# Altium PCB lab2_Kondrashova_buck_boost.PcbDoc
Units mm, origin at the board's own origin, x right, y up, seen from the top; angles counter-clockwise.
Board outline 37.1 x 18.6 mm, 4 copper layers (Top Layer, Signal Layer 1, Signal Layer 2, Bottom Layer), stack 1.522 mm thick; 17 components, 10 nets, 51 pads, 132 vias.
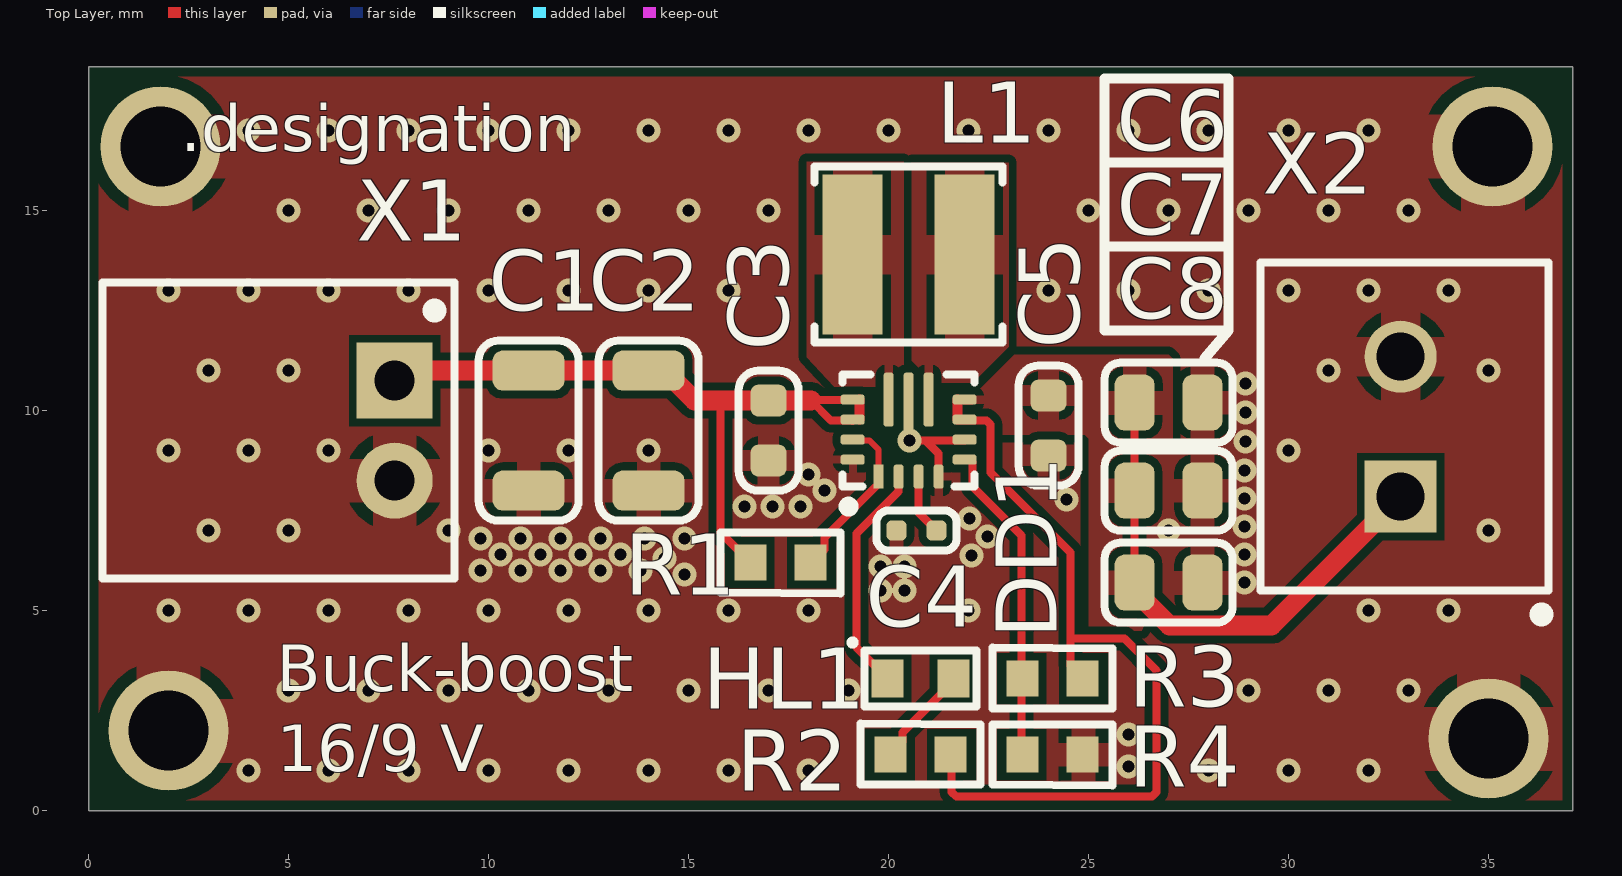
[diagram p0: Top Layer view]
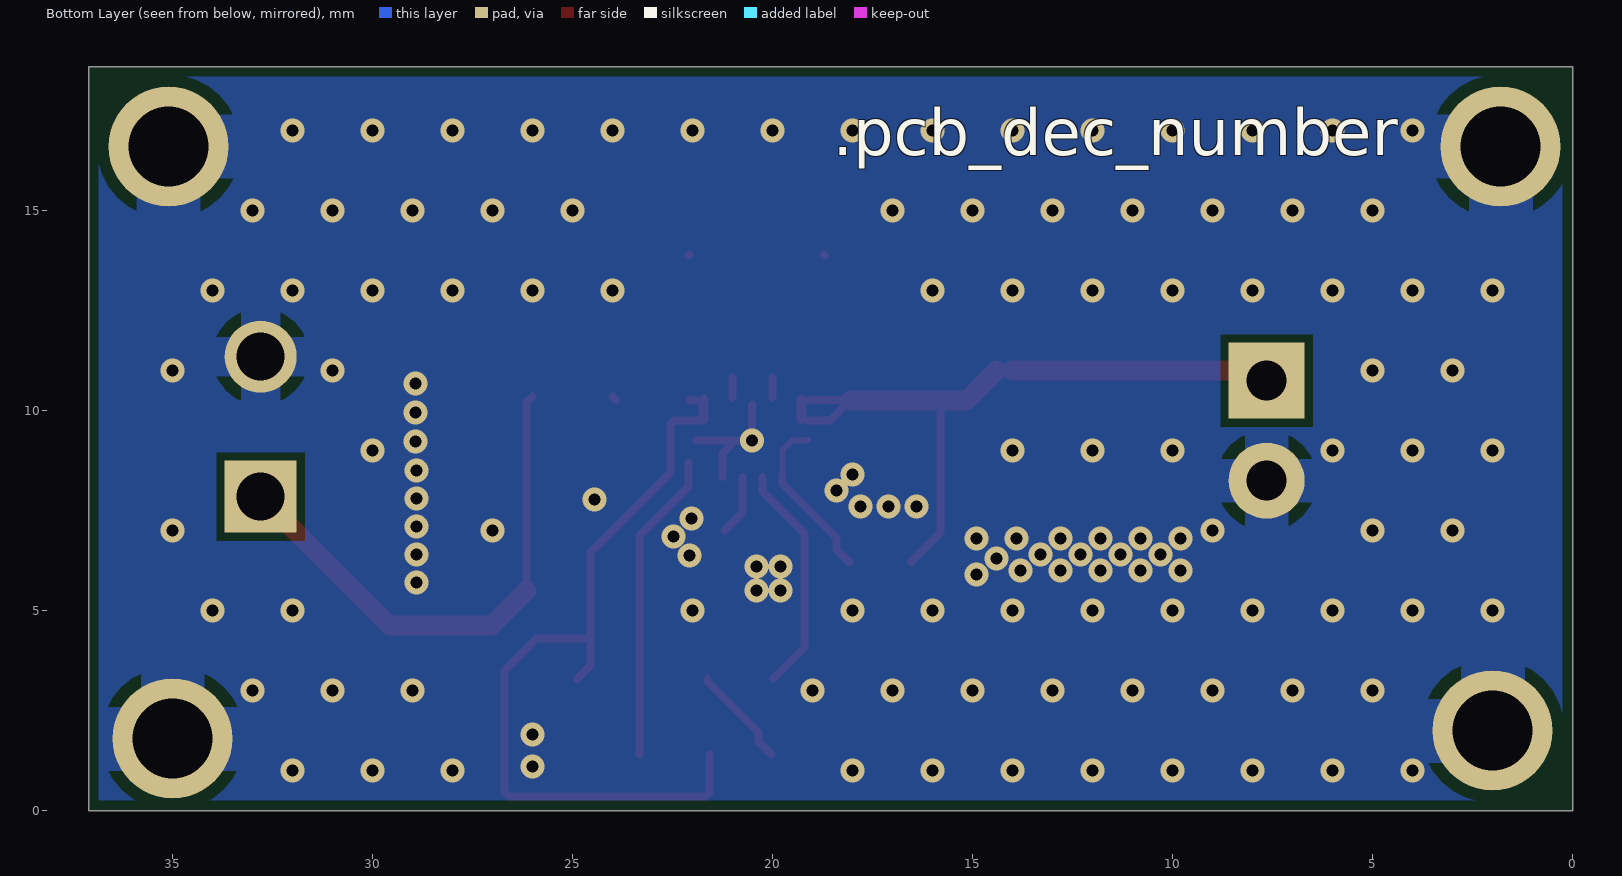
[diagram p1: Bottom Layer view, seen from below]
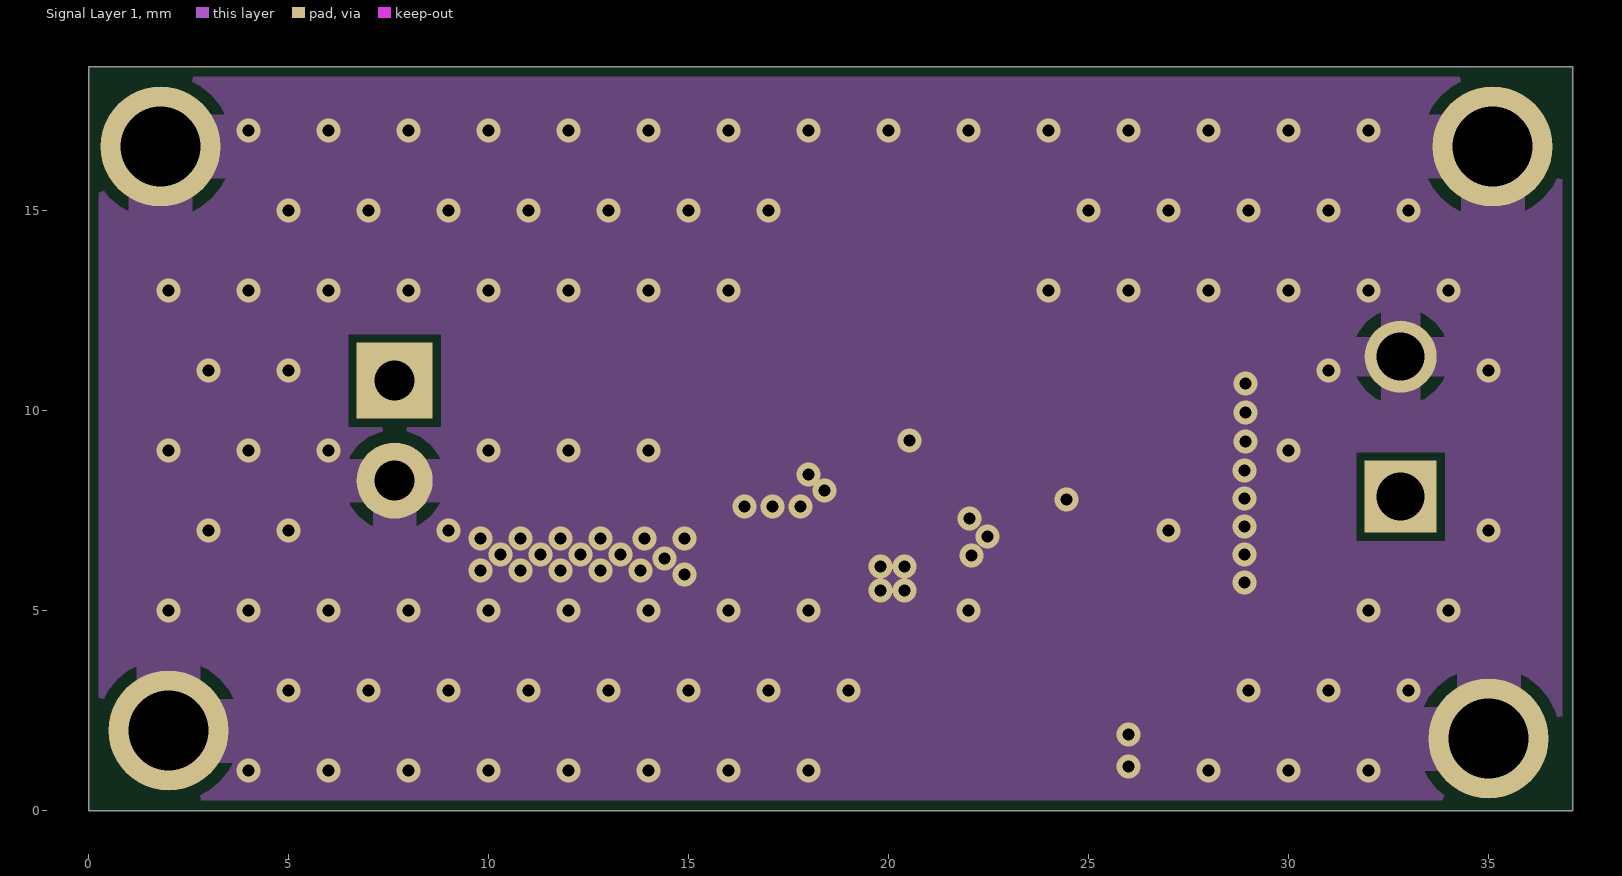
[diagram p2: Signal Layer 1]
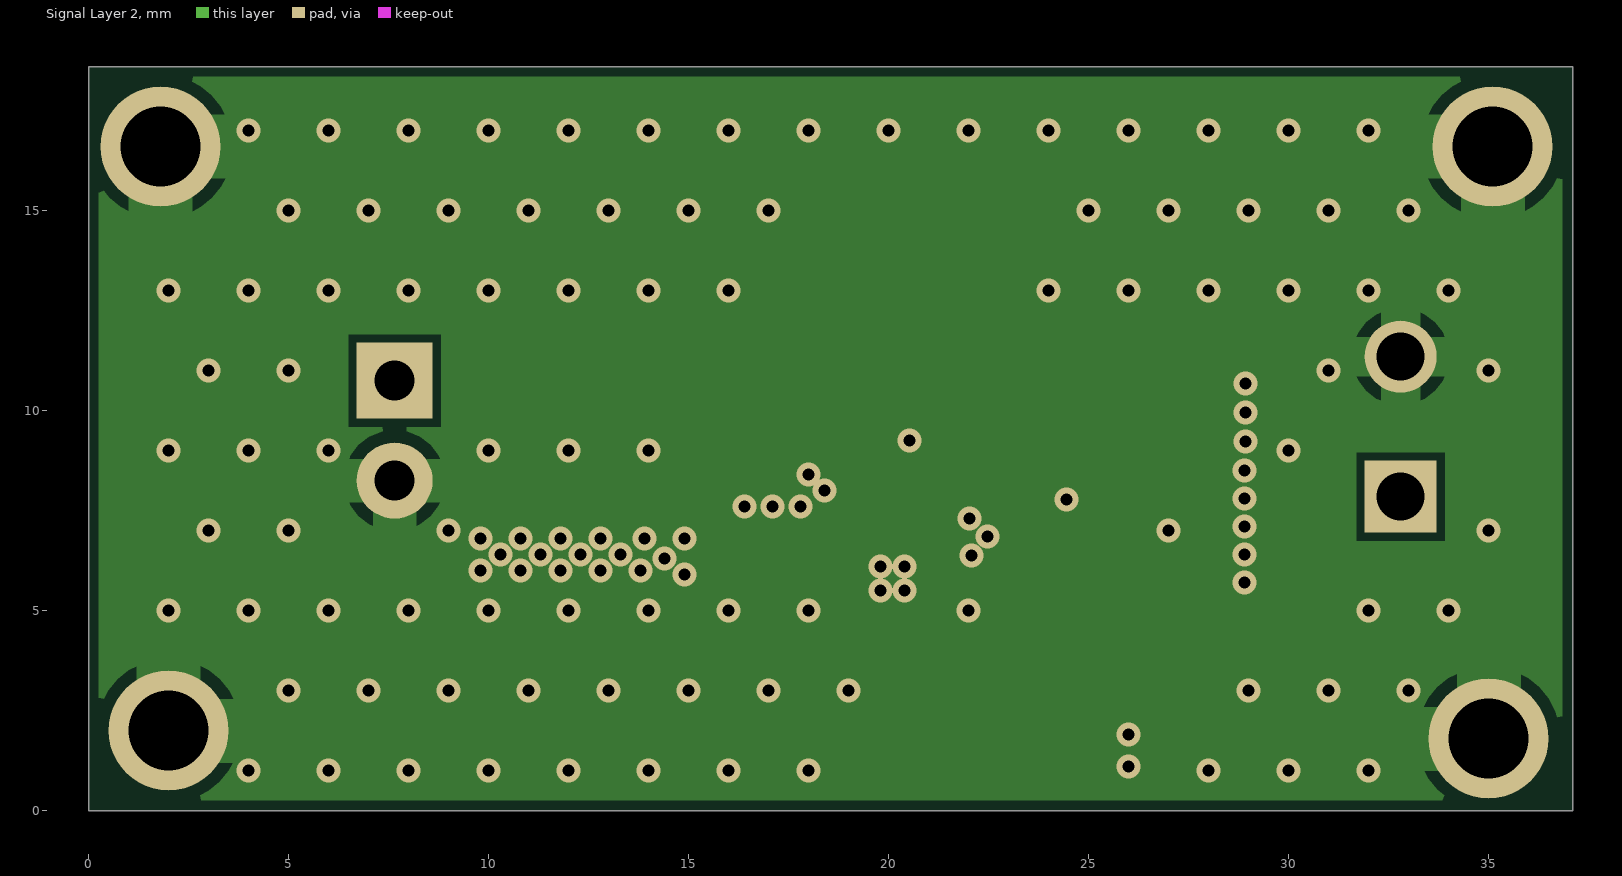
[diagram p3: Signal Layer 2]
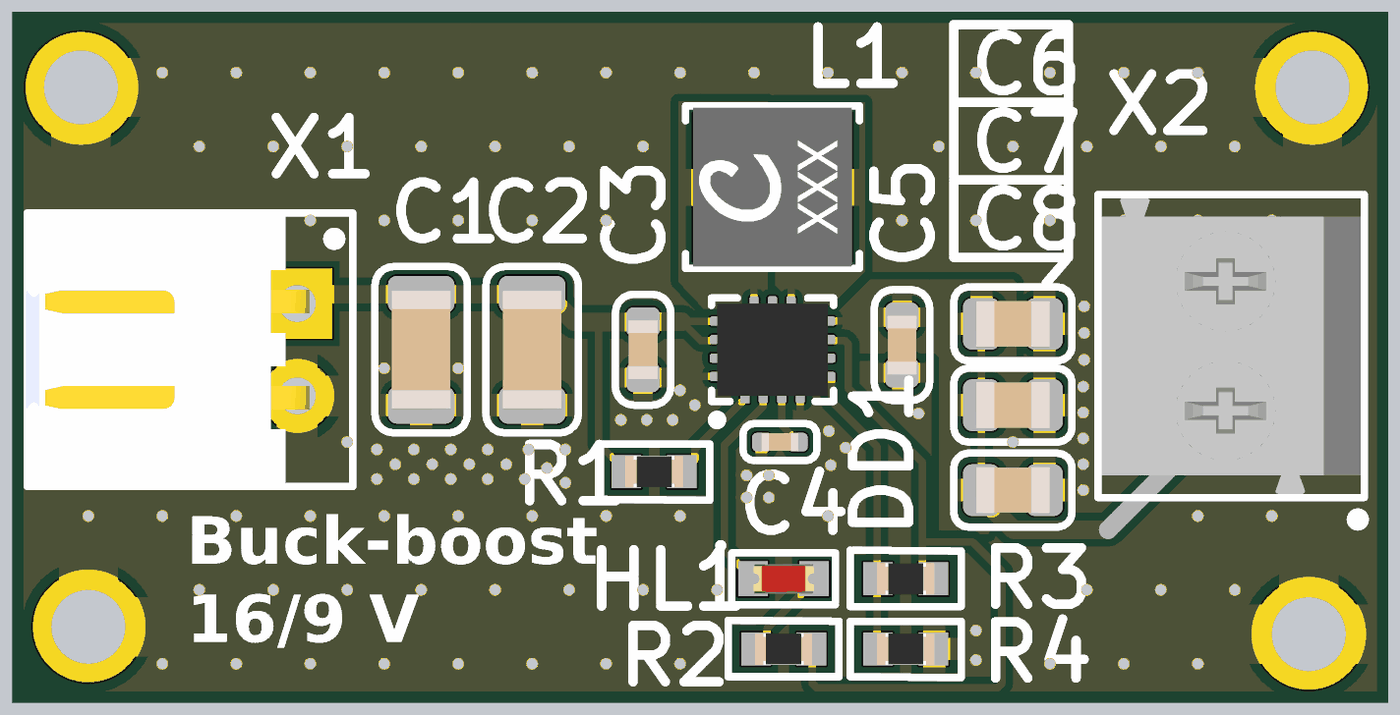
[diagram p4: 3D render of the assembled board from above, using the file's embedded part models]

## Layer stack, top to bottom
Top Solder: solder mask 0.0102, Solder Resist, Dk 3.5
Top Layer: signal copper 0.018
Prepreg 1: prepreg 0.125, FR4 HiTg170, Dk 5.07
Signal Layer 1: signal copper 0.018
Core 1: core 1.2, FR4, Dk 4.6
Signal Layer 2: signal copper 0.018
Prepreg 2: prepreg 0.125, FR4 HiTg170, Dk 5.07
Bottom Layer: signal copper 0.018
Bottom Solder: solder mask 0.0102, Solder Resist, Dk 3.5

## Board outline
0,0 37.1,0 37.1,18.6 0,18.6

## Design rules (kind name [scope] priority, off if disabled: settings)
AcuteAngle min_acute_angle [OnCopper] p1: minimum=3.50000000000000E+0001 checktracksonly=FALSE // Минимальный угол между примитивами топологии
BoardOutlineClearance board_outline_clearance_std [NOT (OnLayer('Bottom Overlay') OR OnLayer('Top Overlay'))] p1: gap=0.25 ignorepadtopadclearanceinfootprint=FALSE except(0: Arc-SplitContinuation Track-SplitContinuation SMDPad-SplitContinuation THPad-SplitContinuation Via-SplitContinuation Fill-SplitContinuation Poly-SplitContinuation Region-SplitContinuation Text-SplitContinuation) // Отступ элементов топологии от края фрезеруемой печатной платы
Clearance clearance_outer_18um_std [OnTopLayer OR OnBottomLayer] p1: gap=0.125 ignorepadtopadclearanceinfootprint=TRUE except(0.2: Arc-Fill Arc-Poly Track-Fill Track-Poly SMDPad-SMDPad SMDPad-Fill SMDPad-Poly THPad-Fill THPad-Poly Via-Fill Via-Poly Fill-Fill Fill-Poly Poly-Poly Poly-Region Poly-Text; 0.25: Arc-Hole Track-Hole SMDPad-Hole THPad-Hole Via-Hole Fill-Hole Poly-Hole Region-Hole Text-Hole) // Зазоры на внешних слоях
Clearance clearance_inner_18um_std [NOT (OnTopLayer Or OnBottomLayer)] p2: gap=0.125 ignorepadtopadclearanceinfootprint=FALSE except(0.2: Arc-Fill Arc-Poly Track-Fill Track-Poly SMDPad-SMDPad SMDPad-Fill SMDPad-Poly THPad-Fill THPad-Poly Via-Fill Via-Poly Fill-Fill Fill-Poly Poly-Poly Poly-Region Poly-Text; 0.25: Arc-Hole Track-Hole SMDPad-Hole THPad-Hole Via-Hole Fill-Hole Poly-Hole Region-Hole Text-Hole) // Зазоры на внутренних слоях
ComponentClearance [All] p1: gap=0 collisioncheckmode=3 verticalgap=0 showdistances=FALSE
DiffPairsRouting diff_pairs_routing [All] p1: maxlimit=0.254 minlimit=0.127 mostfreqgap=0.254 toplayer_maxgap=0.127 toplayer_prefgap=0.127 toplayer_minwidth=0.143 toplayer_maxwidth=0.143 toplayer_prefwidth=0.143 midlayer1_minwidth=0.381 midlayer1_maxwidth=0.381 midlayer1_prefwidth=0.381 midlayer2_minwidth=0.381 midlayer2_maxwidth=0.381 midlayer2_prefwidth=0.381 bottomlayer_maxgap=0.127 bottomlayer_prefgap=0.127 bottomlayer_minwidth=0.143 bottomlayer_maxwidth=0.143 bottomlayer_prefwidth=0.143 impedanceprofiledriven=TRUE impedanceprofileid={FD46899E-B5A2-4EF5-A302-5D2DB6A51F35} maxuncoupledlength=12.7 // Правила трассировки дифференциальных пар
HoleSize min_hole_size_std [IsPad] p1: absolutevalues=TRUE maxlimit=5.9 minlimit=0.6 maxpercent=80.000 minpercent=20.000 // Диаметр межслойного переходного отверстия
HoleSize min_hole_size_via_std [IsVia] p2: absolutevalues=TRUE maxlimit=5.9 minlimit=0.3 maxpercent=80.000 minpercent=20.000 // Минимальный диаметр монтажного отверстия
HoleToHoleClearance hole_to_hole_clearance_std [All] p1: gap=0.2 allowstackedmicrovias=FALSE // Минимальное расстояние между краями двух отверстий
MinimumAnnularRing min_via_ar_std [All] p1: minimumring=0.15 // Поясок площадки переходного отверстия (Annular ring VIA)
MinimumAnnularRing min_pad_ar_std [All] p2: minimumring=0.2 // Поясок монтажной контактной площадки (Annular ring PAD)
MinimumSolderMaskSliver min_solder_mask_bridge_std [All] p1: minsoldermaskwidth=0.15 // Мнимальная ширина масочного мостика
PlaneClearance plane_clearance_18um_std [All] p1: clearance=0.2 // Отступ полигона (для слоя plane) от элементов топологии
PlaneConnect [All] p1: planeconnectstyle=Relief reliefexpansion=0.5 reliefentries=4 reliefconductorwidth=0.2 reliefairgap=0.2
PolygonConnect poly_connect_to_pad<=0.3 [(AsMM(PadXSize_AllLayers)<=0.301) or (AsMM(PadYSize_AllLayers)<=0.301)] p1: thpad.connectstyle=Relief thpad.reliefconductorwidth=0.2 thpad.reliefentries=4 thpad.polygonreliefangle="90 Angle" thpad.airgapwidth=0.2 smdpad.connectstyle=Relief smdpad.reliefconductorwidth=0.2 smdpad.reliefentries=4 smdpad.polygonreliefangle="90 Angle" smdpad.airgapwidth=0.2 via.connectstyle=Direct via.reliefconductorwidth=0.254 via.reliefentries=4 via.polygonreliefangle="90 Angle" via.airgapwidth=0.254 // Правила подключения полигонов для падов от 0,3мм и меньше
PolygonConnect poly_connect_to_pad<=0.4 [(AsMM(PadXSize_AllLayers)<=0.401) or (AsMM(PadYSize_AllLayers)<=0.401)] p2: thpad.connectstyle=Relief thpad.reliefconductorwidth=0.26 thpad.reliefentries=4 thpad.polygonreliefangle="90 Angle" thpad.airgapwidth=0.2 smdpad.connectstyle=Relief smdpad.reliefconductorwidth=0.26 smdpad.reliefentries=4 smdpad.polygonreliefangle="90 Angle" smdpad.airgapwidth=0.2 via.connectstyle=Direct via.reliefconductorwidth=0.254 via.reliefentries=4 via.polygonreliefangle="90 Angle" via.airgapwidth=0.254 // Правила подключения полигонов для падов от 0,4 и меньше
PolygonConnect poly_connect_to_pad<=0.6 [(AsMM(PadXSize_AllLayers)<=0.601) or (AsMM(PadYSize_AllLayers)<=0.601)] p3: thpad.connectstyle=Relief thpad.reliefconductorwidth=0.33 thpad.reliefentries=4 thpad.polygonreliefangle="90 Angle" thpad.airgapwidth=0.2 smdpad.connectstyle=Relief smdpad.reliefconductorwidth=0.33 smdpad.reliefentries=4 smdpad.polygonreliefangle="90 Angle" smdpad.airgapwidth=0.2 via.connectstyle=Direct via.reliefconductorwidth=0.254 via.reliefentries=4 via.polygonreliefangle="90 Angle" via.airgapwidth=0.254 // Правила подключения полигонов для падов от 0,6мм и меньше
PolygonConnect poly_connect_to_pad<=0.7 [(AsMM(PadXSize_AllLayers)<=0.701) or (AsMM(PadYSize_AllLayers)<=0.701)] p4: thpad.connectstyle=Relief thpad.reliefconductorwidth=0.46 thpad.reliefentries=4 thpad.polygonreliefangle="90 Angle" thpad.airgapwidth=0.2 smdpad.connectstyle=Relief smdpad.reliefconductorwidth=0.46 smdpad.reliefentries=4 smdpad.polygonreliefangle="90 Angle" smdpad.airgapwidth=0.2 via.connectstyle=Direct via.reliefconductorwidth=0.254 via.reliefentries=4 via.polygonreliefangle="90 Angle" via.airgapwidth=0.254 // Правила подключения полигонов для падов от 0,7мм и меньше
PolygonConnect poly_connect_to_pad<=0.8 [(AsMM(PadXSize_AllLayers)<=0.8)or(AsMM(PadYSize_AllLayers)<=0.8)] p5: thpad.connectstyle=Relief thpad.reliefconductorwidth=0.53 thpad.reliefentries=4 thpad.polygonreliefangle="90 Angle" thpad.airgapwidth=0.3 smdpad.connectstyle=Relief smdpad.reliefconductorwidth=0.53 smdpad.reliefentries=4 smdpad.polygonreliefangle="90 Angle" smdpad.airgapwidth=0.2 via.connectstyle=Direct via.reliefconductorwidth=0.254 via.reliefentries=4 via.polygonreliefangle="90 Angle" via.airgapwidth=0.254 // Правила подключения полигонов для падов от 0,8мм и меньше
PolygonConnect poly_connect_to_pad<=1 [(AsMM(PadXSize_AllLayers)<=1.01)or(AsMM(PadYSize_AllLayers)<=1.01)] p6: thpad.connectstyle=Relief thpad.reliefconductorwidth=0.6 thpad.reliefentries=4 thpad.polygonreliefangle="90 Angle" thpad.airgapwidth=0.3 smdpad.connectstyle=Relief smdpad.reliefconductorwidth=0.6 smdpad.reliefentries=4 smdpad.polygonreliefangle="90 Angle" smdpad.airgapwidth=0.2 via.connectstyle=Direct via.reliefconductorwidth=0.254 via.reliefentries=4 via.polygonreliefangle="90 Angle" via.airgapwidth=0.254 // Правила подключения полигонов для падов от 1мм и меньше
PolygonConnect poly_connect_to_pad<=1.3 [(AsMM(PadXSize_AllLayers)<=1.31)or(AsMM(PadYSize_AllLayers)<=1.31)] p7: thpad.connectstyle=Relief thpad.reliefconductorwidth=0.66 thpad.reliefentries=4 thpad.polygonreliefangle="90 Angle" thpad.airgapwidth=0.3 smdpad.connectstyle=Relief smdpad.reliefconductorwidth=0.86 smdpad.reliefentries=4 smdpad.polygonreliefangle="90 Angle" smdpad.airgapwidth=0.2 via.connectstyle=Direct via.reliefconductorwidth=0.254 via.reliefentries=4 via.polygonreliefangle="90 Angle" via.airgapwidth=0.254 // Правила подключения полигонов для падов от 1,3мм и меньше
PolygonConnect poly_connect_to_pad<=1.6 [(AsMM(PadXSize_AllLayers)<=1.61)or(AsMM(PadYSize_AllLayers)<=1.61)] p8: thpad.connectstyle=Relief thpad.reliefconductorwidth=0.8 thpad.reliefentries=4 thpad.polygonreliefangle="90 Angle" thpad.airgapwidth=0.3 smdpad.connectstyle=Relief smdpad.reliefconductorwidth=1 smdpad.reliefentries=4 smdpad.polygonreliefangle="90 Angle" smdpad.airgapwidth=0.2 via.connectstyle=Direct via.reliefconductorwidth=0.254 via.reliefentries=4 via.polygonreliefangle="90 Angle" via.airgapwidth=0.254 // Правила подключения полигонов для падов от 1,6мм и меньше
PolygonConnect poly_connect_to_pad<=1.8 [(AsMM(PadXSize_AllLayers)<=1.8)or(AsMM(PadYSize_AllLayers)<=1.8)] p9: thpad.connectstyle=Relief thpad.reliefconductorwidth=1 thpad.reliefentries=4 thpad.polygonreliefangle="90 Angle" thpad.airgapwidth=0.3 smdpad.connectstyle=Relief smdpad.reliefconductorwidth=1.2 smdpad.reliefentries=4 smdpad.polygonreliefangle="90 Angle" smdpad.airgapwidth=0.2 via.connectstyle=Direct via.reliefconductorwidth=0.254 via.reliefentries=4 via.polygonreliefangle="90 Angle" via.airgapwidth=0.254 // Правила подключения полигонов для падов от 1,8мм и меньше
PolygonConnect poly_connect_to_pad<=2 [(AsMM(PadXSize_AllLayers)<=2.01)or(AsMM(PadYSize_AllLayers)<=2.01)] p10: thpad.connectstyle=Relief thpad.reliefconductorwidth=1.1 thpad.reliefentries=4 thpad.polygonreliefangle="90 Angle" thpad.airgapwidth=0.3 smdpad.connectstyle=Relief smdpad.reliefconductorwidth=1.4 smdpad.reliefentries=4 smdpad.polygonreliefangle="90 Angle" smdpad.airgapwidth=0.2 via.connectstyle=Direct via.reliefconductorwidth=0.254 via.reliefentries=4 via.polygonreliefangle="90 Angle" via.airgapwidth=0.254 // Правила подключения полигонов для падов от 2мм и меньше
PolygonConnect poly_connect_to_pad<=2.3 [(AsMM(PadXSize_AllLayers)<=2.31)or(AsMM(PadYSize_AllLayers)<=2.31)] p11: thpad.connectstyle=Relief thpad.reliefconductorwidth=1.2 thpad.reliefentries=4 thpad.polygonreliefangle="90 Angle" thpad.airgapwidth=0.3 smdpad.connectstyle=Relief smdpad.reliefconductorwidth=1.4 smdpad.reliefentries=4 smdpad.polygonreliefangle="90 Angle" smdpad.airgapwidth=0.2 via.connectstyle=Direct via.reliefconductorwidth=0.254 via.reliefentries=4 via.polygonreliefangle="90 Angle" via.airgapwidth=0.254 // Правила подключения полигонов для падов от 2,3мм и меньше
PolygonConnect poly_connect_to_pad<=2.5 [(AsMM(PadXSize_AllLayers)<=2.51)or(AsMM(PadYSize_AllLayers)<=2.51)] p12: thpad.connectstyle=Relief thpad.reliefconductorwidth=1.2 thpad.reliefentries=4 thpad.polygonreliefangle="90 Angle" thpad.airgapwidth=0.3 smdpad.connectstyle=Relief smdpad.reliefconductorwidth=1.4 smdpad.reliefentries=4 smdpad.polygonreliefangle="90 Angle" smdpad.airgapwidth=0.2 via.connectstyle=Direct via.reliefconductorwidth=0.254 via.reliefentries=4 via.polygonreliefangle="90 Angle" via.airgapwidth=0.254 // Правила подключения полигонов для падов от 2,5мм и меньше
PolygonConnect poly_connect_to_pad<=2.7 [(AsMM(PadXSize_AllLayers)<=2.71)or(AsMM(PadYSize_AllLayers)<=2.71)] p13: thpad.connectstyle=Relief thpad.reliefconductorwidth=1.4 thpad.reliefentries=4 thpad.polygonreliefangle="90 Angle" thpad.airgapwidth=0.3 smdpad.connectstyle=Relief smdpad.reliefconductorwidth=1.6 smdpad.reliefentries=4 smdpad.polygonreliefangle="90 Angle" smdpad.airgapwidth=0.2 via.connectstyle=Direct via.reliefconductorwidth=0.254 via.reliefentries=4 via.polygonreliefangle="90 Angle" via.airgapwidth=0.254 // Правила подключения полигонов для падов от 2,7мм и меньше
PolygonConnect poly_connect_to_pad<=3 [(AsMM(PadXSize_AllLayers)<=3.01)or(AsMM(PadYSize_AllLayers)<=3.01)] p14: thpad.connectstyle=Relief thpad.reliefconductorwidth=1.6 thpad.reliefentries=4 thpad.polygonreliefangle="90 Angle" thpad.airgapwidth=0.3 smdpad.connectstyle=Relief smdpad.reliefconductorwidth=1.8 smdpad.reliefentries=4 smdpad.polygonreliefangle="90 Angle" smdpad.airgapwidth=0.2 via.connectstyle=Direct via.reliefconductorwidth=0.254 via.reliefentries=4 via.polygonreliefangle="90 Angle" via.airgapwidth=0.254 // Правила подключения полигонов для падов от 3мм и меньше
PolygonConnect poly_connect_to_pad<=7 [(AsMM(PadXSize_AllLayers)<7.01)or(AsMM(PadYSize_AllLayers)<=7.01)] p15: thpad.connectstyle=Relief thpad.reliefconductorwidth=2 thpad.reliefentries=4 thpad.polygonreliefangle="90 Angle" thpad.airgapwidth=0.4 smdpad.connectstyle=Relief smdpad.reliefconductorwidth=2 smdpad.reliefentries=4 smdpad.polygonreliefangle="90 Angle" smdpad.airgapwidth=0.3 via.connectstyle=Direct via.reliefconductorwidth=0.254 via.reliefentries=4 via.polygonreliefangle="90 Angle" via.airgapwidth=0.254 // Правила подключения полигонов для падов от 7мм и меньше
PolygonConnect poly_connect_to_pad [All] p16: thpad.connectstyle=Relief thpad.reliefconductorwidth=0.25 thpad.reliefentries=4 thpad.polygonreliefangle="90 Angle" thpad.airgapwidth=0.2 smdpad.connectstyle=Relief smdpad.reliefconductorwidth=0.25 smdpad.reliefentries=4 smdpad.polygonreliefangle="90 Angle" smdpad.airgapwidth=0.2 via.connectstyle=Direct via.reliefconductorwidth=0.25 via.reliefentries=4 via.polygonreliefangle="90 Angle" via.airgapwidth=0.2 // Правила подключения полигонов общие
RoutingCorners [All] p1 off: cornerstyle=45-Degree minsetback=2.5 maxsetback=2.5
RoutingVias [All] p1: holewidth=0.3 width=0.6 viastyle="Through Hole" minholewidth=0.3 minwidth=0.6 maxholewidth=5.9 maxwidth=6.4
SilkToSilkClearance silk_to_silk_clearance_std [All] p1 off: silktosilkclearance=0.15 // Отступ текста шелкографии от других примитивов шелкографии
SilkToSolderMaskClearance silk_to_solder_mask_clearance_std [IsPad] p1 off: minsilkscreentomaskgap=0.15 clearancetoexposedcopper=FALSE // Минимальное расстояние между элементами шелкографии и вскрытой медью
SolderMaskExpansion solder_mask_expansion_std [All] p1: expansion=0.05 // Припуск паяльной масски
UnRoutedNet [All] p1: checkbadconnections=TRUE
Width width_18um_std [All] p1: maxlimit=10 minlimit=0.125 preferedwidth=0.15 checkconnectedcopper=TRUE // Ширина проводников (общая)
19 further rules are at their usual default settings.

## Components (designator, comment, footprint, x,y, rotation, side; value= is the part's Value field where it differs from the comment)
C1 "10 мк" C1206 11,9.5 r270 top
C2 "10 мк" C1206 14,9.5 r270 top
C3 "10 мк" C0603 17,9.5 r270 top
C4 "0,1 мк" C0402 20.7,7 r180 top
C5 "10 мк" C0603 24,9.625 r270 top
C6 "22 мк" C0805 27,10.2 r180 top
C7 "22 мк" C0805 27,8 r180 top
C8 "22 мк" C0805 27,5.7 r180 top
DD1 "TPS63070RNMT" VQFN-HR-15 20.5,9.5 r90 top
HL1 "TLMG1100-GS08" HL0603 20.8,3.3 r0 top
L1 "XFL4020-152ME" XFL-2-400X400X210 20.5,13.9 r0 top
R1 "10 к" R0603 17.3,6.2 r0 top
R2 "100 к" R0603 20.8,1.4 r180 top
R3 "402 к" R0603 24.1,3.3 r180 top
R4 "39 к" R0603 24.1,1.4 r0 top
X1 "DS1029-2-MRW6XB" DS1029-2-MRW6XB 4.5,9.5 r270 top
X2 "1776275-2" 1776275-2 32.9,9.6 r90 top

## Footprints (in the part's own frame and the unit in brackets; to place one, negate y for a bottom-side part, rotate by r counter-clockwise, add the part's x,y. Pads: shape width x height; smd on the part's side, far side on the other; paste and mask are expansions set on the pad)
1776275-2 [mm] "PCB Terminal Blocks, Header, Wire-to-Board, 2 Position, 3.5mm [.138in] Centerline, 1 Row, Side Wire Entry Angle, 26 – 18AWG Wire Size"
  rect 1.8x1.8 hole 1.2: 1(-1.75,0.1)
  round 1.8 hole 1.2: 2(1.75,0.1)
  silkscreen extent -4.7,-3.6 4.1,3.6, body extent -4,-3.5 4,3.5, height 8.3
C0402 [mm] "Chip Capacitor, 2-Leads, Body 1,00x0,50mm, IPC Medium Density"
  rrect50% 0.5x0.5 smd: 1(-0.5,0) 2(0.5,0)
  silkscreen extent -1,-0.5 1,0.5, body extent -0.5,-0.25 0.5,0.25, height 0.5
C0603 [mm] "Chip Capacitor, 2-Leads, Body 1,60x0,80mm, IPC Medium Density"
  rrect50% 0.8x0.9 smd: 1(-0.75,0) 2(0.75,0)
  silkscreen extent -1.5,-0.75 1.5,0.75, body extent -0.8,-0.4 0.8,0.4, height 0.8
C0805 [mm] "Chip Capasitor, 2-Leads, Body 2,00x1,25mm, IPC Medium Density"
  rrect50% 1x1.4 smd: 1(-0.85,0) 2(0.85,0)
  silkscreen extent -1.6,-1 1.6,1, body extent -1,-0.62 1,0.63, height 0.6
C1206 [mm] "Chip Capacitor, 2-Leads, Body 3,20x1,60mm, IPC Medium Density"
  rrect50% 1x1.8 smd: 1(-1.5,0) 2(1.5,0)
  silkscreen extent -2.25,-1.25 2.25,1.25, body extent -1.6,-0.8 1.6,0.8, height 0.78
DS1029-2-MRW6XB [mm]
  rect 1.9x1.9 hole 1: 1(-1.25,3.15)
  round 1.9 hole 1: 2(1.25,3.15)
  silkscreen extent -3.7,-4.15 3.7,4.65, body extent -3.7,-4.17 3.7,3.47, height 5.75
HL0603 [mm] "Chip Diode, 2-Leads, Body 1,60x0,80mm, IPC Medium Density"
  rect 0.8x0.95 smd: 1(-0.825,0) 2(0.825,0)
  silkscreen extent -1.75,-0.7 1.4,0.95, body extent -0.81,-0.4 0.81,0.4, height 0.6
R0603 [mm] "Chip Resistor, 2-Leads, Body 1,60x0,80mm, IPC Medium Density"
  rect 0.8x0.9 smd: 1(-0.75,0) 2(0.75,0)
  silkscreen extent -1.5,-0.77 1.5,0.75, body extent -0.77,-0.43 0.78,0.43, height 0.43
VQFN-HR-15 [mm] "TSQFP, 15-Leads, Body 2,50x3,00mm, Pitch 0,50mm, IPC Medium Density"
  rect 0.6x0.25 smd: 1(-1.15,0.75)
  rrect50% 0.6x0.25 smd: 2(-1.15,0.25) 3(-1.15,-0.25) 4(-1.15,-0.75)
  rrect50% 0.25x0.6 smd: 5(-0.725,-1.4) 6(-0.225,-1.4) 7(0.275,-1.4) 8(0.775,-1.4) 12(0.775,1.397) 13(0.275,1.397) 14(-0.225,1.4) 15(-0.725,1.4)
  rrect50% 1.35x0.25 smd: 9(0.775,-0.5) 11(0.775,0.5)
  rrect50% 1.7x0.25 smd: 10(0.6,0)
  Top Layer pour cut-out: 1.875,0.65
  Top Layer region: 1.905,1.524
  Top Layer lines w0.254: 0.275,1.225 0.775,1.225 ; 0.275,-1.225 0.775,-1.225
  silkscreen extent -2.02,-1.65 1.4,1.65, body extent -1.25,-1.5 1.25,1.5, height 1
XFL-2-400X400X210 [mm] "Chip Inductor, 2-Leads, Body 4,00x4,00mm, IPC Medium Density"
  rect 1.5x4 smd: 1(-1.4,0) 2(1.4,0)
  silkscreen extent -2.35,-2.2 2.35,2.2, body extent -2.15,-2.15 2.15,2.15, height 2.1

## Part data
C1 C2: library part c0095, "=Описание", HelpURL=https://www.yageo.com/upload/media/product/productsearch/datasheet/mlcc/UPY-GPHC_X7R_6.3V-to-50V_20.pdf, ID=c0095, Корпус=1206, Наименование=CC1206KRX7R8BB475, Напряжение="25 В", Номинал="10 мк", Номинальное напряжение="25 В", Описание="Конденсатор чип 1206 10 мкФ 25 В ±10 %", Отклонение="±10 %", Производитель="YAGEO Corp.", Рабочие температуры="от –55 °С до +125 °С", Температурный коэффициент емкости=X7R, Фамилия=Паньков
C3 C5: library part c0090, "=Описание", HelpURL=https://www.yageo.com/upload/media/product/productsearch/datasheet/mlcc/UPY-GPHC_X5R_4V-to-50V_26.pdf, ID=c0090, Корпус=0603, Наименование=CC0603KRX5R8BB106, Напряжение="25 В", Номинал="10 мк", Номинальное напряжение="25 В", Описание="Конденсатор чип 0603 10 мкФ 25 В ±10 %", Отклонение="±10 %", Производитель="YAGEO Corp.", Рабочие температуры="от –55 °С до +85 °С", Температурный коэффициент емкости=X5R, Фамилия=Паньков
C4: library part c0029, "=Описание", HelpURL=https://www.yageo.com/upload/media/product/productsearch/datasheet/mlcc/UPY-GPHC_X5R_4V-to-50V_26.pdf, ID=c0029, Корпус=0402, Наименование=CC0402KRX5R8BB104, Напряжение="25 В", Номинал="0,1 мк", Номинальное напряжение="25 В", Описание="Конденсатор чип 0402 100 нФ 25 В ±10 %", Отклонение="±10 %", Производитель="YAGEO Corp.", Рабочие температуры="от –55 °С до +85 °С", Температурный коэффициент емкости=X5R, Фамилия=Паньков
C6 C7 C8: library part c0100, "=Описание", HelpURL=https://www.yageo.com/upload/media/product/productsearch/datasheet/mlcc/UPY-GPHC_X5R_4V-to-50V_26.pdf, ID=c0100, Корпус=0805, Наименование=CC0805KRX5R7BB226, Напряжение="16 В", Номинал="22 мк", Номинальное напряжение="16 В", Описание="Конденсатор чип 0805 22 мкФ 16 В ±10 %", Отклонение="±10 %", Производитель="YAGEO Corp.", Рабочие температуры="от –55 °С до +85 °С", Температурный коэффициент емкости=X5R, Фамилия=Паньков
DD1: library part dd0014, "=Описание", HelpURL=https://www.ti.com/product/TPS63070, ID=dd0014, Входное напряжение="от 2 В до 16 В", Выходное напряжение="от 2,5 В до 9 В", Коммутируемый ток="до 2 А", Корпус=VQFN-HR-15, Наименование=TPS63070RNMT, Описание="Повышающий/понижающий преобразователь напряжения 16 В и 2 А", Производитель="Texas Instruments", Рабочие температуры="от –40 °С до +125 °С", Фамилия=Кондрашова, Частота переключения="от 2,1 МГц до 2,8 МГц"
HL1: library part hl0005, "=Описание", HelpURL=https://www.vishay.com/leds/list/product-83173/, ID=hl0005, Корпус=0603, Наименование=TLMG1100-GS08, Номинальная длина волны="570 нм", Номинальная сила света="35 мкд", Номинальное падение напряжения="2,1 В", Номинальный прямой ток="30 мА", Описание="Светодиод чип 0603 зеленый", Производитель="Vishay Intertechnology, Inc.", Рабочие температуры="от -40 °С до +100 °С", Рассеиваемая мощность="90 мВт", Фамилия=Ларионов, Цвет=Green
L1: library part l0001, "=Описание", HelpURL=https://www.coilcraft.com/en-us/products/power/shielded-inductors/molded-inductor/xfl/xfl4020/, ID=l0001, Индуктивность="1,5 мкГн", Корпус="4,0 x 4,0 x 2,1", Максимальное активное сопротивление="15,8 мОм", Наименование=XFL4020-152ME, Номинал="1,5 мкГн", Номинальное активное сопротивление="14,4 мОм", Номинальный ток (при нагреве на 20 °С/40 °С)="9,1 А", Описание="Катушка индуктивности 1,5 мкГн ±20 %", Отклонение="±20 %", Производитель="Coilcraft, Inc.", Рабочее напряжение="от 0 В до 20 В", Рабочие температуры="от –40 °С до +125 °С", Резонансная частота="59 МГц", Ток насыщения="4,4 А", Фамилия=Кондрашова
R1: library part r0060, "=Описание", HelpURL=https://www.yageo.com/upload/media/product/productsearch/datasheet/rchip/PYu-RC_Group_51_RoHS_L_11.pdf, ID=r0060, Корпус=0603, Наименование=RC0603FR-0710KL, Номинал="10 к", Номинальное напряжение="75 В", Номинальный ток="1 А", Описание="Резистор чип 0603 10 кОм ±1 % 0,1 Вт", Отклонение="±1 %", Производитель="YAGEO Corp.", Рабочие температуры="от –55 °С до +155 °С", Фамилия=Самарин
R2: library part r0094, "=Описание", HelpURL=https://www.yageo.com/upload/media/product/productsearch/datasheet/rchip/PYu-RC_Group_51_RoHS_L_11.pdf, ID=r0094, Корпус=0603, Наименование=RC0603FR-07100KL, Номинал="100 к", Номинальное напряжение="75 В", Номинальный ток="1 А", Описание="Резистор чип 0603 100 кОм ±1 % 0,1 Вт", Отклонение="±1 %", Производитель="YAGEO Corp.", Рабочие температуры="от –55 °С до +155 °С", Фамилия=Водорезов
R3: library part r0129, "=Описание", HelpURL=https://www.yageo.com/upload/media/product/productsearch/datasheet/rchip/PYu-RC_Group_51_RoHS_L_11.pdf, ID=r0129, Корпус=0603, Наименование=RC0603FR-07402RL, Номинал="402 к", Номинальное напряжение="75 В", Номинальный ток="1 А", Описание="Резистор чип 0603 402 кОм ±1 % 0,1 Вт", Отклонение="±1 %", Производитель="YAGEO Corp.", Рабочие температуры="от –55 °С до +155 °С", Фамилия=Паньков
R4: library part r0079, "=Описание", HelpURL=https://www.yageo.com/upload/media/product/productsearch/datasheet/rchip/PYu-RC_Group_51_RoHS_L_11.pdf, ID=r0079, Корпус=0603, Наименование=RC0603FR-0739KL, Номинал="39 к", Номинальное напряжение="75 В", Номинальный ток="1 А", Описание="Резистор чип 0603 39 кОм ±1 % 0,1 Вт", Отклонение="±1 %", Производитель="YAGEO Corp.", Рабочие температуры="от –55 °С до +155 °С", Фамилия=Паньков
X1: library part x0007, "=Описание", Contact_1=VIN, Contact_2=GND, HelpURL=http://www.connfly.com/productshow.aspx?id=352, ID=x0007, Наименование=DS1029-2-MRW6XB, Описание="CWF 2 pin Type B 2,5 мм вилка угловой", Производитель="Connfly Electronic Co. LTD.", Фамилия=Ларионов
X2: library part x0005, "=Описание", Contact_1=VOUT, Contact_2=GND, HelpURL=https://www.te.com/usa-en/product-1776275-2.html, ID=x0005, Наименование=1776275-2, Описание="Terminal Block 2 pin 3,5 мм", Производитель="TE Connectivity", Фамилия=Паньков

## Free pads (board coordinates)
  round 3 hole 2: 2(1.8,16.6) 2(2,2) 2(35,1.8) 2(35.1,16.6)

## Via types
v1: diameter 0.6/0.6/0.6/0.6 (per signal layer), hole 0.3, Top Layer to Bottom Layer, tented both sides, 132 vias

## Nets (pads, with @x,y where several pads share a name; then routed paths per layer and width w, separated by ;. In a path a pad name is that pad's centre, name@x,y a point inside that pad or via, vN(x,y) a via of type N, cw(c..) or ccw(c..) an arc to the next point about the centre after c; other vN are vias at no path point)
16V_IN: C1.1 C2.1 C3.1 DD1.12 DD1.13 R1.1 X1.1 | length 17.5
  Top Layer w0.2: X1.1 X1.1@7.9,11 ; C2.1 C2.1@14.4,11 ; 15.8,10.25 15.8,6.95 16.525,6.225 R1.1@16.525,6.2 ; DD1.13@19.103,9.738 19.093,9.748 18.563,9.748 18.055,10.256 18.06,10.262 DD1.12@19.103,10.262
  Top Layer w0.381: C3.1 C3.1@17.006,10.256
  Top Layer w0.5: X1.1@7.9,11 C1.1 C2.1 ; C2.1@14.4,11 15.15,10.25 15.8,10.25 C3.1 ; C3.1@17.006,10.256 18.055,10.256
EN: DD1.1 DD1.14 R1.2 | length 4.3
  Top Layer w0.15: DD1.14 19.125,9.25 19.525,9.25 19.75,9.025 DD1.1 DD1.1@19.75,8.344
  Top Layer w0.2: R1.2@18.075,6.2 18.4,6.525 18.4,6.819 19.75,8.169 DD1.1@19.75,8.344
FB: DD1.5 R3.2 R4.1 | length 7.8
  Top Layer w0.2: DD1.5@22.1,8.7 22.1,8.1 23.325,6.875 23.325,3.3 R4.1@23.325,1.4
GND: C1.2 C2.2 C3.2 C4.2 C5.2 C6.1 C7.1 C8.1 DD1.4 DD1.6 DD1.10 DD1.15 pad.2 R4.2 X1.2 X2.2 | length 3.3
  Top Layer w0.2: DD1.10@20.5,10.15 20.51,10.14 20.51,9.259 v1(20.518,9.25) 20.925,9.25 ; DD1.4@21.25,8.344 DD1.4 21.25,8.925 20.925,9.25 ; DD1.6@21.9,9.25 20.925,9.25
  other v1: 4,1 6,1 8,1 10,1 12,1 14,1 16,1 18,1 28,1 30,1 32,1 26,1.1 26,1.9 5,3 7,3 9,3 11,3 13,3 15,3 17,3 19,3 29,3 31,3 33,3 2,5 4,5 6,5 8,5 10,5 12,5 14,5 16,5 18,5 22,5 32,5 34,5 19.8,5.5 20.4,5.5 28.9,5.7 14.9,5.9 9.8,6 10.8,6 11.8,6 12.8,6 13.8,6 19.8,6.1 20.4,6.1 14.4,6.3 22.075,6.375 10.3,6.4 11.3,6.4 12.3,6.4 13.3,6.4 28.9,6.4 9.8,6.8 10.8,6.8 11.8,6.8 12.8,6.8 13.9,6.8 14.9,6.8 22.475,6.85 3,7 5,7 9,7 27,7 35,7 28.9,7.1 22.025,7.3 16.4,7.6 17.1,7.6 17.8,7.6 24.45,7.775 28.9,7.8 18.4,8 18,8.4 28.9,8.5 2,9 4,9 6,9 10,9 12,9 14,9 30,9 28.925,9.225 28.925,9.95 28.925,10.675 3,11 5,11 31,11 35,11 2,13 4,13 6,13 8,13 10,13 12,13 14,13 16,13 24,13 26,13 28,13 30,13 32,13 34,13 5,15 7,15 9,15 11,15 13,15 15,15 17,15 25,15 27,15 29,15 31,15 33,15 4,17 6,17 8,17 10,17 12,17 14,17 16,17 18,17 20,17 22,17 24,17 26,17 28,17 30,17 32,17
NetDD1_9: DD1.9 L1.2 | length 0.5
  Top Layer w0.2: DD1.9@21,10.325 DD1.9@21,10.825 ; L1.2@22.08,13.9 L1.2@22.1,13.88
NetDD1_11: DD1.11 L1.1 | length 0.5
  Top Layer w0.2: L1.1@18.7,13.88 L1.1@18.72,13.9 ; DD1.11@20,10.325 DD1.11@20,10.825
NetHL1_2: HL1.2 R2.2 | length 2.6
  Top Layer w0.2: R2.2@20.025,1.4 20.35,1.725 20.35,1.95 21.625,3.225 HL1.2
PGOOD: DD1.2 HL1.1 | length 5.8
  Top Layer w0.2: HL1.1 19.2,4.075 19.2,6.925 20.25,7.975 DD1.2@20.25,8.344
VAUX: C4.1 DD1.3 | length 1.5
  Top Layer w0.2: DD1.3@20.75,8.344 20.75,7.45 C4.1
VOUT: C5.1 C6.2 C7.2 C8.2 DD1.7 DD1.8 R2.1 R3.1 X2.1 | length 33.5
  Top Layer w0.2: R2.1@21.575,1.4 21.575,0.467 21.692,0.35 26.583,0.35 26.7,0.467 26.7,3.5 25.9,4.3 24.55,4.3 ; DD1.7@21.725,9.775 21.725,9.773 21.748,9.75 21.9,9.75 22.45,9.75 22.55,9.65 22.55,8.45 24.55,6.45 24.55,4.3 ; DD1.8@21.9,10.25 22.075,10.25 DD1.8@22.085,10.26 ; C5.1@23.91,10.26 C5.1@24,10.35 ; R3.1@24.875,3.275 24.875,3.3 24.55,3.625 24.55,4.3 ; C6.2@26,10.35 C6.2 C7.2 C8.2 C8.2@26.15,5.5
  Top Layer w0.5: C8.2@26.15,5.5 27.025,4.625 29.575,4.625 X2.1

## Polygon pours and split planes (outlines as drawn)
GND on Top Layer "Top Layer-GND 7" (solid, pour order 112): 0,0 0,18.5 37,18.5 37,0
GND on Top Layer "Top Layer-GND 4" (solid, pour order 16): 24.3,2.3 24.3,0.5 26.5,0.5 26.5,2.3
GND on Top Layer "Top Layer-GND 6" (solid, pour order 108): 21.25,8.431 21.769,8.431 21.8,8.4 21.8,8 22.8,7 22.8,6 21.8,6 21.7,6.1 21.7,7.5 21.2,7.5 21,7.7 21,8.2 21.019,8.2
NetDD1_9 on Top Layer "Top Layer-NetDD1_9" (solid, pour order 98): 20.375,16.2 20.375,11.45 21.125,10.7 22.1,10.7 23,11.6 23,16.2
GND on Top Layer "Top Layer-GND" (solid, pour order 86): 19.5,7 20.7,7 20.7,5.1 19.5,5.1
NetDD1_11 on Top Layer "Top Layer-NetDD1_11" (solid, pour order 70): 20.375,10.6 18.641,10.6 17.95,11.337 17.95,16.225 20.375,16.225
GND on Top Layer "Top Layer-GND 2" (solid, pour order 34): 23,9.1 24.9,9.1 24.9,6.9 24.7,6.7 23.7,7.6 23,8.3
GND on Top Layer "Top Layer-GND 3" (solid, pour order 32): 16.1,8.7 18,8.7 19.267,8.744 18.36,7.3 16.2,7.3 16.1,7.4
VOUT on Top Layer "Top Layer-+9V 1" (solid, pour order 6): 21.694,9.956 23.137,11.4 27,11.4 27.1,11.3 27.1,9.3 25,9.3 24.9,9.4 22.25,9.4
no net on Top Layer "Top Layer-No Net 4" (solid, pour order 110): 0,18.5
VOUT on Top Layer "Top Layer-+9V" (solid, pour order 8): 25,9.3 25,4.6 25.1,4.5 27.1,4.5 27.1,9.3
GND on Top Layer "Top Layer-GND 5" (solid, pour order 10): 27.4,11.4 27.4,5 29.2,5 29.5,5.3 29.5,11.4
no net on Top Layer "Top Layer-No Net" (solid, pour order 102): 22.3,12.9
no net on Top Layer "Top Layer-No Net 1" (solid, pour order 100): 22.3,12.9
no net on Top Layer "Top Layer-No Net 2" (solid, pour order 50): 21.2,11.2
no net on Top Layer "Top Layer-No Net 3" (solid, pour order 42): 20,10.825
GND on Top Layer "Top Layer-GND 1" (solid, pour order 36): 9.4,8.2 15.2,8.2 15.3,8.1 15.3,5.5 9.4,5.5
GND on Bottom Layer "Bottom Layer-GND" (solid, pour order 114): 0,0 0,18.5 37,18.5 37,0
GND on Signal Layer 1 "Signal Layer 1-GND" (solid, pour order 126): 0,0 0,18.5 37,18.5 37,0
GND on Signal Layer 2 "Signal Layer 2-GND" (solid, pour order 128): 0,0 0,18.5 37,18.5 37,0

## Silkscreen, mask and mechanical layers (free items; w line width, h text height)
Top Overlay:
  lines w0.254: 27.9,11.3 28.5,12 ; 28.5,14.1 25.4,14.1 25.4,16.2 ; 28.5,16.2 25.4,16.2 ; 25.4,16.2 25.4,18.3 ; 25.4,18.3 28.5,18.3 28.5,12 ; 25.4,18.3 25.4,12 28.5,12 ; 28.5,12 28.5,12
  text ".designation" at 2.3,16.1 h2
  text "Buck-boost / 16/9 V" at 4.7,0.6 h2
Bottom Overlay:
  text ".pcb_dec_number" at 18.5,16 h2
Board:
  the board outline again, w0.1
Assembly Notes (Mech5):
  text "'.title'" at -0.05,-4.475 h2
  text "'.project'_'.pcb_dec_number'['.Pcb_File_Name_No_Path']" at -0.175,-7.7 h2